# EAGLE board PCBvfinal v1 v3finaaaaal (EAGLE 9.7.0)
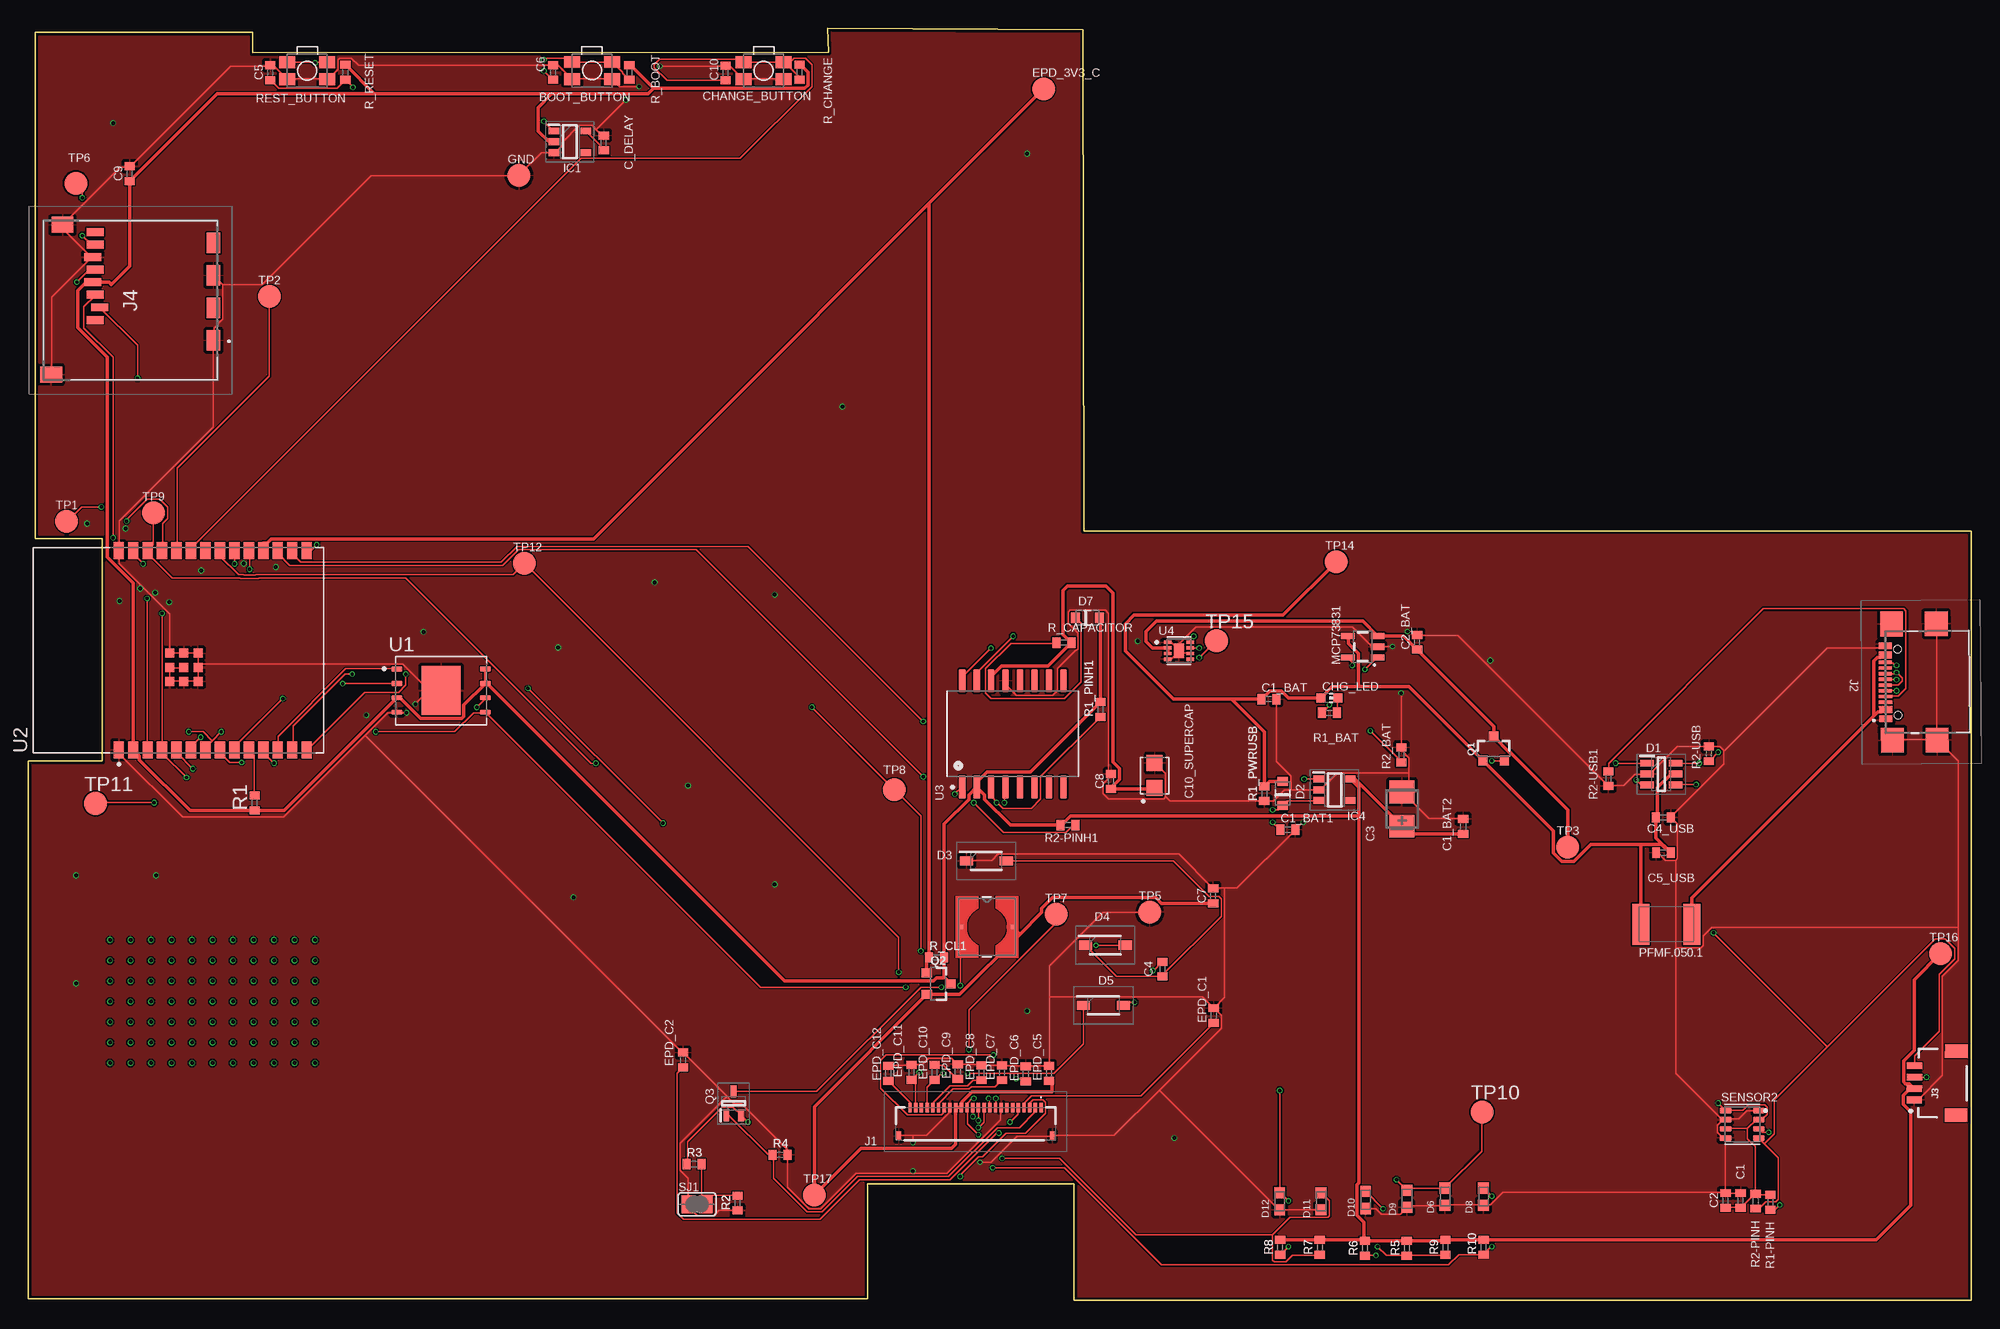
[diagram p0: board, top side]
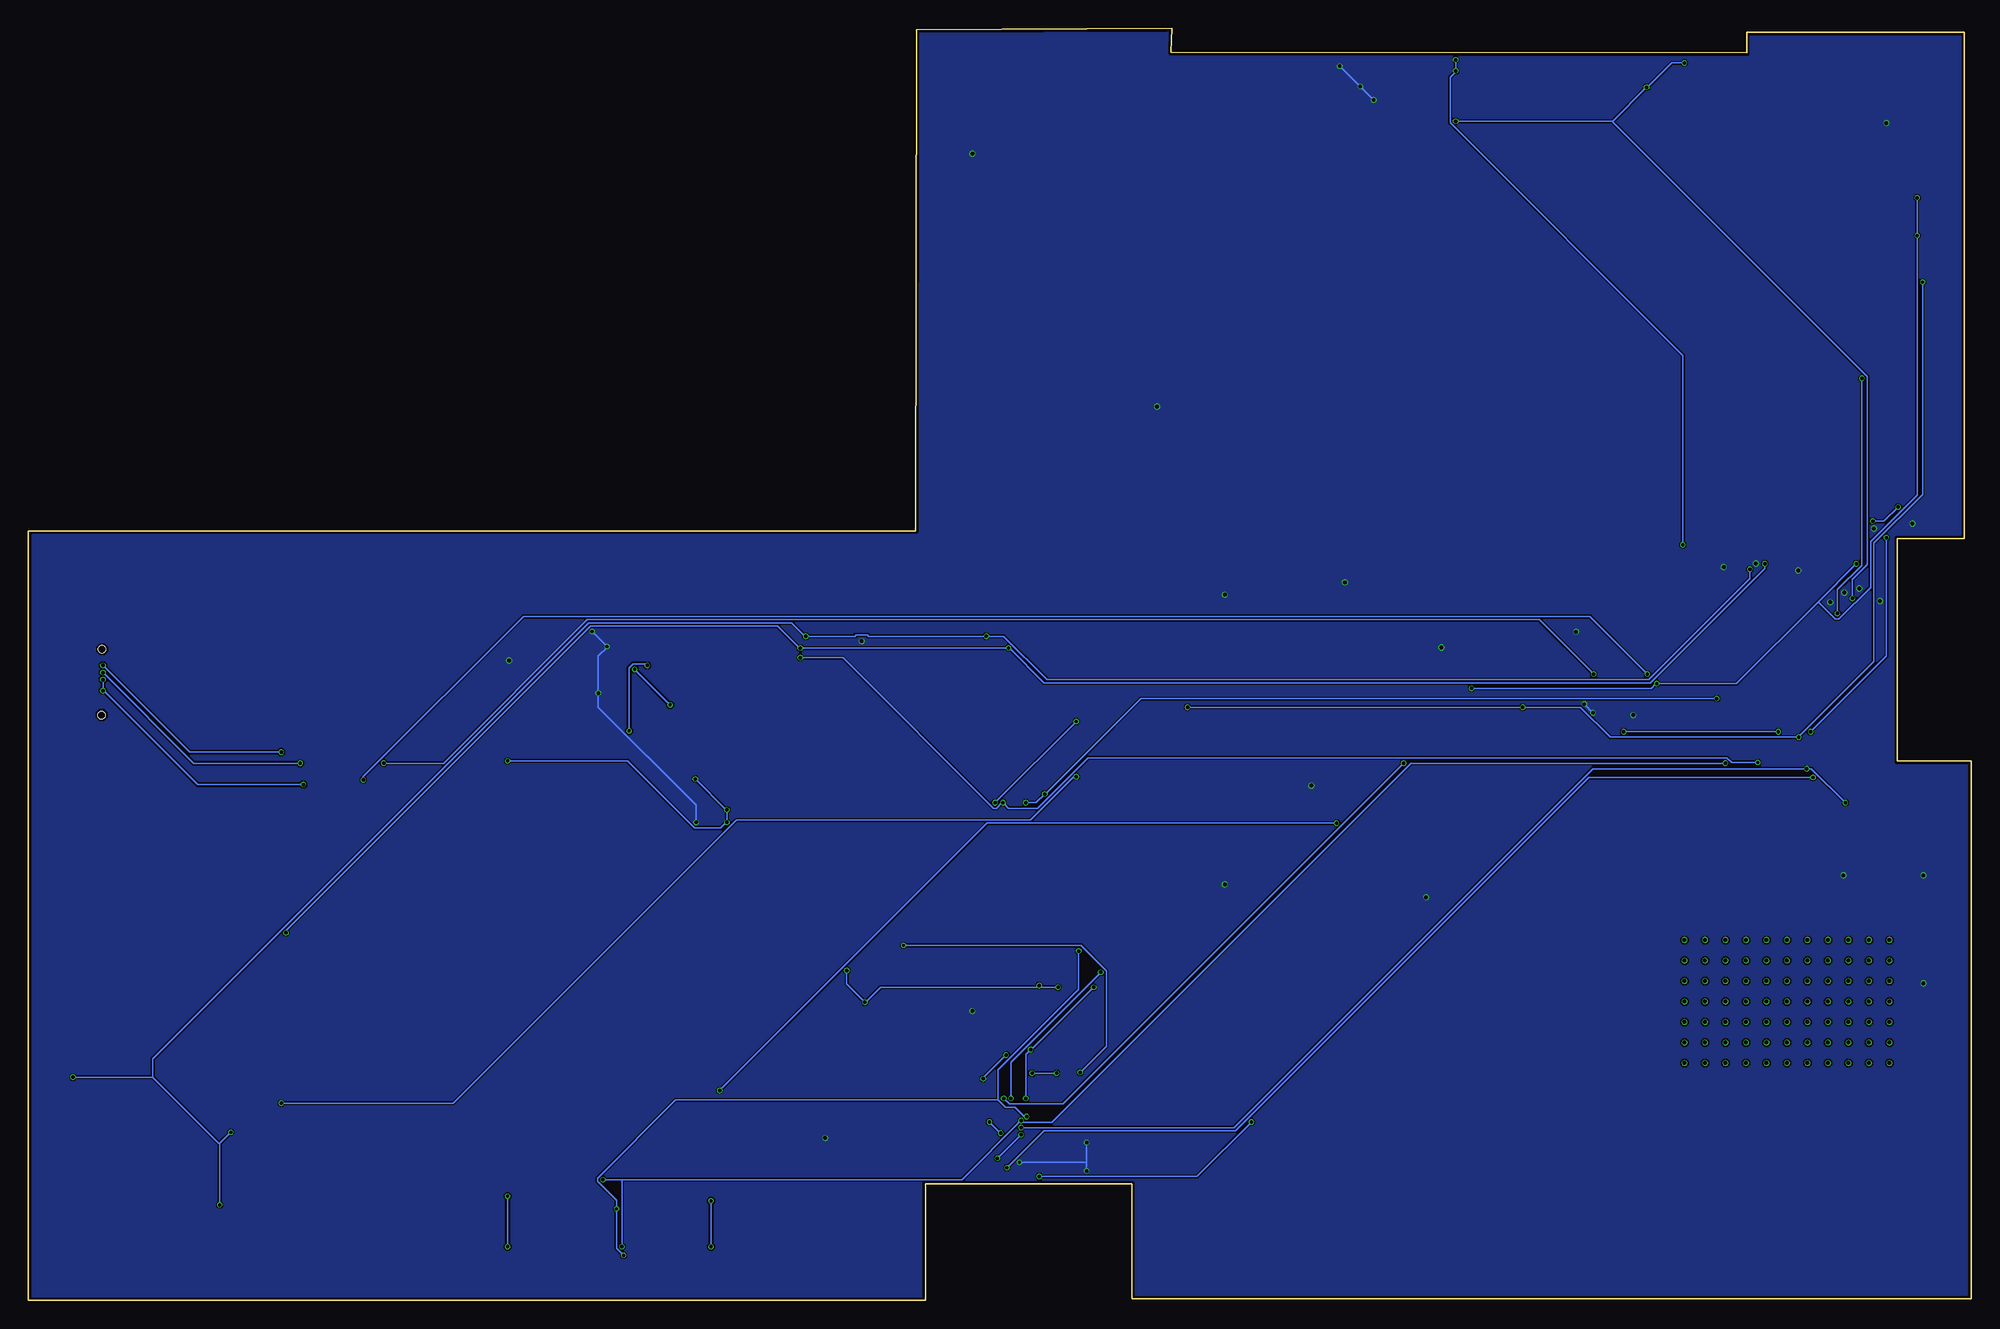
[diagram p1: board, bottom side, seen from below]

Size 170.55 x 111.69 mm. Coordinates in mm from the lower left corner, seen from the top.
Outline: 91.81,0 170.55,0 170.55,67.57 92.66,67.57 92.6,111.59 70.17,111.69 70.24,109.59 19.68,109.55 19.68,111.35 0.6,111.35 0.6,66.89 6.48,66.89 6.48,47.35 0,47.35 0,0.15 73.68,0.15 73.68,10.23 91.81,10.23 91.81,0
Copper layers (1*16): Top / Bottom
Stack-up Default Layer Stack: Top User Defined 0.035mm / Dielectric-1 User Defined 1.6mm / Bottom User Defined 0.035mm
Design rules: minimum copper width classes=1 0.3mm, minimum copper width classes=0 0.15mm, minimum copper width 5mil, minimum drill size 0.3mm, copper clearance wire_polygon to wire_polygon 5mil, copper clearance wire_polygon to pad_smd 5mil, copper clearance wire_polygon to via 5mil, copper clearance pad_smd to pad_smd 5mil, copper clearance pad_smd to via 5mil, copper clearance via to via 5mil, copper clearance smd to pad (same net) 5mil, copper clearance smd to via (same net) 5mil, copper clearance smd to smd (same net) 5mil, dimension clearance 0.2mm, via restrict clearance 0mil, restrict clearance 0mil, drill distance 6mil, keepout clearance 0mil
Net classes: 0 default: width 0.15 mm; 1 POWER: width 0.3 mm

## Footprints (pad centres in the part's own frame; a part is rotated, then mirrored left to right if it is on the bottom)
MYBUTTON = smd 1.4 x 1.05: 1 1.75,0.75; 2 -1.75,0.75; 3 -1.75,-0.75; 4 1.75,-0.75
ESP32_WROVER_EAGLE-LTSPICE_C0402 = smd 0.7 x 0.9: 1 -0.65,0; 2 0.65,0
RCL_CT3528 = smd 2 x 2.2: + -1.5,0; - 1.5,0
CAPCP3225X100N = smd 1.4 x 1.4: 1 -1.1,0; 2 1.1,0
ADAFRUIT_CHIP-LED0603 = smd 0.8 x 0.8: A 0,-0.75; C 0,0.75
SOT95P280X145-6N = smd 1.2 x 0.6: 1 -1.25,0.95; 2 -1.25,0; 3 -1.25,-0.95; 4 1.25,-0.95; 5 1.25,0; 6 1.25,0.95
ESP32_WROVER_AVX---SD0805S020S1R0_AVX_SD0805S020S1R0_0 = smd 0.8 x 0.9: 1 -1.05,0; 2 1.05,0
SOD3716X135N = smd 1.15 x 0.8: 1 -1.75,0; 2 1.75,0
DIOC1608X36N = smd 0.97 x 0.94: 1 -0.75,0; 2 0.75,0
TP20R = smd 2 x 2: TP 0,0
SOT95P280X125-5N = smd 0.9 x 0.6: 1 -1.4,0.95; 2 -1.4,0; 3 -1.4,-0.95; 4 1.4,-0.95; 5 1.4,0.95
SOT95P280X120-5N = smd 0.9 x 0.6: 1 -1.4,0.95; 2 -1.4,0; 3 -1.4,-0.95; 4 1.4,-0.95; 5 1.4,0.95
FH34SRJ24S05SH99 = smd 0.3 x 0.8: 1 5.75,1.45; 2 5.25,1.45; 3 4.75,1.45; 4 4.25,1.45; 5 3.75,1.45; 6 3.25,1.45; 7 2.75,1.45; 8 2.25,1.45; 9 1.75,1.45; 10 1.25,1.45; 11 0.75,1.45; 12 0.25,1.45; 13 -0.25,1.45; 14 -0.75,1.45; 15 -1.25,1.45; 16 -1.75,1.45; 17 -2.25,1.45; 18 -2.75,1.45; 19 -3.25,1.45; 20 -3.75,1.45; 21 -4.25,1.45; 22 -4.75,1.45; 23 -5.25,1.45; 24 -5.75,1.45 | smd 0.4 x 0.8: MP1 6.75,-1.05; MP2 -6.75,-1.05
SAMACSYS_PARTS_USB4110GFA = smd 0.3 x 1.15: A1 -3.35,3.678; A4 -2.55,3.678; A5 -1.25,3.678; A6 -0.25,3.678; A7 0.25,3.678; A8 1.25,3.678; A9 2.55,3.678; A12 3.35,3.678; B1 3.05,3.678; B4 2.25,3.678; B5 1.75,3.678; B6 0.75,3.678; B7 -0.75,3.678; B8 -1.75,3.678; B9 -2.25,3.678; B12 -3.05,3.678 | smd 2.18 x 2: MP1 -5.11,-0.827; MP2 5.11,-0.827; MP3 -5.11,3.103; MP4 5.11,3.103 | hole 0.65: -2.89,2.603; 2.89,2.603
JST04_1MM_RA = smd 0.6 x 1.35: 1 -1.5,0; 2 -0.5,0; 3 0.5,0; 4 1.5,0 | smd 1.2 x 2: NC1 2.8,-3.675; NC2 -2.8,-3.675
112ATAARR03ATTEND = smd 1.8 x 1.2: G1 10.6,10.4; G2 4.9,10.4; S1 7.75,10.4; S2 2.05,10.4 | smd 1.4 x 1.9: G3 13.6,-3.85; G4 0.45,-2.85 | smd 0.7 x 1.5: P1 8.8,0; P2 7.7,0.4; P3 6.6,0; P4 5.5,-0.2; P5 4.4,0; P6 3.3,-0.2; P7 2.2,0; P8 1.1,0
IND_4828-WE-TPC_WRE = smd 0.33 x 0.33: 1 -2.286,0; 2 2.286,0
ESP32_WROVER_SPARKFUN-IC-POWER_SOT23-5 = smd 0.55 x 1.2: 1 -0.95,-1.3; 2 0,-1.3; 3 0.95,-1.3; 4 0.95,1.3; 5 -0.95,1.3
ESP32C6_VARISTOR_CT/CN1812 = smd 1.5 x 3.6: 1 -2.25,0; 2 2.25,0
ESP32_WROVER_SPARKFUN-DISCRETESEMI_SOT23-3 = smd 0.8 x 0.9: 1 -0.95,-1; 2 0.95,-1; 3 0,1.1
SOT65P210X110-3N = smd 1.05 x 0.5: 1 -1.05,0.65; 2 -1.05,-0.65; 3 1.05,0
ESP32_WROVER_EAGLE-LTSPICE_R0402 = smd 0.7 x 0.9: 1 -0.65,0; 2 0.65,0
ESP32_WROVER_BME680_PSON80P300X300X100-8N = smd 1.016 x 0.5: 1 1.458,1.2; 2 1.458,0.4; 3 1.458,-0.4; 4 1.458,-1.2; 5 -1.458,-1.22; 6 -1.458,-0.4; 7 -1.458,0.4; 8 -1.458,1.2
SJ = smd 1.168 x 1.6: 1 -0.762,0; 2 0.762,0
SON127P600X800X80-9N = smd 0.94 x 0.44: 1 -3.895,1.905; 2 -3.895,0.635; 3 -3.895,-0.635; 4 -3.895,-1.905; 5 3.895,-1.905; 6 3.895,-0.635; 7 3.895,0.635; 8 3.895,1.905 | smd 3.4 x 4.3: 9 0,0
XCVR_ESP32-C6-WROOM-1-N8 = smd 1.5 x 0.9: 1 -8.75,5.26; 2 -8.75,3.99; 3 -8.75,2.72; 4 -8.75,1.45; 5 -8.75,0.18; 6 -8.75,-1.09; 7 -8.75,-2.36; 8 -8.75,-3.63; 9 -8.75,-4.9; 10 -8.75,-6.17; 11 -8.75,-7.44; 12 -8.75,-8.71; 13 -8.75,-9.98; 14 -8.75,-11.25; 15 8.75,-11.25; 16 8.75,-9.98; 17 8.75,-8.71; 18 8.75,-7.44; 19 8.75,-6.17; 20 8.75,-4.9; 21 8.75,-3.63; 22 8.75,-2.36; 23 8.75,-1.09; 24 8.75,0.18; 25 8.75,1.45; 26 8.75,2.72; 27 8.75,3.99; 28 8.75,5.26 | smd 0.8 x 0.8: 29_1 -2.755,0.79; 29_2 -1.505,0.79; 29_3 -0.255,0.79; 29_4 -2.755,-0.46; 29_5 -1.505,-0.46; 29_6 -0.255,-0.46; 29_7 -2.755,-1.71; 29_8 -1.505,-1.71; 29_9 -0.255,-1.71
SOIC127P1032X265-16N = smd 2.05 x 0.59: 1 -4.655,4.445; 2 -4.655,3.175; 3 -4.655,1.905; 4 -4.655,0.635; 5 -4.655,-0.635; 6 -4.655,-1.905; 7 -4.655,-3.175; 8 -4.655,-4.445; 9 4.655,-4.445; 10 4.655,-3.175; 11 4.655,-1.905; 12 4.655,-0.635; 13 4.655,0.635; 14 4.655,1.905; 15 4.655,3.175; 16 4.655,4.445
SON50P200X200X80-9N = smd 0.76 x 0.27: 1 -0.985,0.75; 2 -0.985,0.25; 3 -0.985,-0.25; 4 -0.985,-0.75; 5 0.985,-0.75; 6 0.985,-0.25; 7 0.985,0.25; 8 0.985,0.75 | smd 0.9 x 1.3: 9 0,0

## Placement (x,y rotation side)
BOOT_BUTTON  BUTTON_CUSYOMV1  [MYBUTTON]  49.48,108 180 top
C1  100nF  [ESP32_WROVER_EAGLE-LTSPICE_C0402]  150.31,8.78 90 top
C1_BAT  4.7uF  [ESP32_WROVER_EAGLE-LTSPICE_C0402]  108.9,52.8 0 top
C1_BAT1  4.7uF  [ESP32_WROVER_EAGLE-LTSPICE_C0402]  110.57,41.34 0 top
C1_BAT2  4.7uF  [ESP32_WROVER_EAGLE-LTSPICE_C0402]  125.96,41.62 90 top
C2  100nF  [ESP32_WROVER_EAGLE-LTSPICE_C0402]  148.99,8.78 90 top
C2_BAT  4.7uF  [ESP32_WROVER_EAGLE-LTSPICE_C0402]  121.91,57.8 90 top
C3  100uF TANT  [RCL_CT3528]  120.59,43.15 90 top
C4  4.7uF/25V  [ESP32_WROVER_EAGLE-LTSPICE_C0402]  99.55,29.09 90 top
C4_USB  100nF  [ESP32_WROVER_EAGLE-LTSPICE_C0402]  143.54,42.42 0 top
C5  1uF  [ESP32_WROVER_EAGLE-LTSPICE_C0402]  21.23,107.81 90 top
C5_USB  4.7uF  [ESP32_WROVER_EAGLE-LTSPICE_C0402]  143.55,39.32 180 top
C6  100nF  [ESP32_WROVER_EAGLE-LTSPICE_C0402]  46.07,107.83 90 top
C7  10uF  [ESP32_WROVER_EAGLE-LTSPICE_C0402]  104.01,35.52 90 top
C8  100nF  [ESP32_WROVER_EAGLE-LTSPICE_C0402]  95.05,45.58 90 top
C9  100nF  [ESP32_WROVER_EAGLE-LTSPICE_C0402]  8.89,98.94 90 top
C10  100nF  [ESP32_WROVER_EAGLE-LTSPICE_C0402]  61.21,107.78 90 top
C10_SUPERCAP  CPH3225A  [CAPCP3225X100N]  98.87,46.09 90 top
C_DELAY  100nF  [ESP32_WROVER_EAGLE-LTSPICE_C0402]  50.51,101.64 90 top
CHANGE_BUTTON  BUTTON_CUSYOMV1  [MYBUTTON]  64.54,107.98 180 top
CHG_LED  [ADAFRUIT_CHIP-LED0603]  114.22,52.9 270 top
D1  USBLC6-2SC6Y  [SOT95P280X145-6N]  143.36,46.22 0 top
D2  ESP32_WROVER_AVX---SD0805S020S1R0_AVX_SD0805S020S1R0_0_0AVX_SD0805S020S1R0_0_0  [ESP32_WROVER_AVX---SD0805S020S1R0_AVX_SD0805S020S1R0_0]  110.11,44.53 90 top
D3  MBR0530  [SOD3716X135N]  84.1,38.6 0 top
D4  MBR0530  [SOD3716X135N]  94.54,31.2 0 top
D5  MBR0530  [SOD3716X135N]  94.38,25.9 0 top
D6  PGB1010603MR  [DIOC1608X36N]  124.36,9.12 90 top
D7  ESP32_WROVER_AVX---SD0805S020S1R0_AVX_SD0805S020S1R0_0_0AVX_SD0805S020S1R0_0_0  [ESP32_WROVER_AVX---SD0805S020S1R0_AVX_SD0805S020S1R0_0]  92.98,59.95 0 top
D8  PGB1010603MR  [DIOC1608X36N]  127.74,9.12 90 top
D9  PGB1010603MR  [DIOC1608X36N]  121.02,8.92 90 top
D10  PGB1010603MR  [DIOC1608X36N]  117.4,8.82 90 top
D11  PGB1010603MR  [DIOC1608X36N]  113.48,8.72 90 top
D12  PGB1010603MR  [DIOC1608X36N]  109.86,8.72 90 top
EPD_3V3_C  TPTP20R  [TP20R]  89.12,106.38 0 top
EPD_C1  1uF/50v  [ESP32_WROVER_EAGLE-LTSPICE_C0402]  104.06,25.02 90 top
EPD_C2  1uF/50V  [ESP32_WROVER_EAGLE-LTSPICE_C0402]  57.47,21.12 90 top
EPD_C5  0.1uF/50V  [ESP32_WROVER_EAGLE-LTSPICE_C0402]  89.59,19.94 90 top
EPD_C6  1uF/50V  [ESP32_WROVER_EAGLE-LTSPICE_C0402]  87.56,19.9 90 top
EPD_C7  1uF/50V  [ESP32_WROVER_EAGLE-LTSPICE_C0402]  85.47,20 90 top
EPD_C8  1uF/50V  [ESP32_WROVER_EAGLE-LTSPICE_C0402]  83.68,20 90 top
EPD_C9  1uF/50V  [ESP32_WROVER_EAGLE-LTSPICE_C0402]  81.59,20.1 90 top
EPD_C10  1uF/50V  [ESP32_WROVER_EAGLE-LTSPICE_C0402]  79.55,20.04 90 top
EPD_C11  1uF/50V  [ESP32_WROVER_EAGLE-LTSPICE_C0402]  77.53,20.04 90 top
EPD_C12  1uF/50V  [ESP32_WROVER_EAGLE-LTSPICE_C0402]  75.49,19.94 90 top
GND  TPTP20R  [TP20R]  43.07,98.78 0 top
IC1  BD5229G-TR  [SOT95P280X125-5N]  47.53,101.74 0 top
IC4  XC6220A331MR-G  [SOT95P280X120-5N]  114.67,44.84 0 top
J1  FH34SRJ-24S-0.5SH_99_  [FH34SRJ24S05SH99]  83.15,15.49 0 top
J2  SAMACSYS_PARTS_USB4110-GF-A  [SAMACSYS_PARTS_USB4110GFA]  166.71,54.31 90.4 top
J3  QWIIC_RIGHT_ANGLE  [JST04_1MM_RA]  165.58,19.11 89.6 top
J4  112A-TAAR-R03_ATTEND  [112ATAARR03ATTEND]  5.85,94.9 270 top
L1  68uH  [IND_4828-WE-TPC_WRE]  84.15,32.8 0 top
MCP73831  ESP32_WROVER_SPARKFUN-IC-POWER_MCP73831  [ESP32_WROVER_SPARKFUN-IC-POWER_SOT23-5]  117.14,57.4 90 top
PFMF.050.1  ESP32C6_VARISTORCN1812  [ESP32C6_VARISTOR_CT/CN1812]  143.8,33.03 180 top
Q1  20V/4.2A/52mΩ/1.4W  [ESP32_WROVER_SPARKFUN-DISCRETESEMI_SOT23-3]  128.64,48.41 0 top
Q2  20V/4.2A/52mΩ/1.4W  [ESP32_WROVER_SPARKFUN-DISCRETESEMI_SOT23-3]  79.86,27.81 270 top
Q3  SI1308EDL-T1-GE3  [SOT65P210X110-3N]  61.91,17.3 90 top
R1  10K  [ESP32_WROVER_EAGLE-LTSPICE_R0402]  19.85,43.68 90 top
R1-PINH  10K  [ESP32_WROVER_EAGLE-LTSPICE_R0402]  152.92,8.62 90 top
R1_BAT  200  [ESP32_WROVER_EAGLE-LTSPICE_R0402]  114.22,51.6 0 top
R1_PINH1  1OK  [ESP32_WROVER_EAGLE-LTSPICE_R0402]  94.11,51.89 90 top
R1_PWRUSB  100K  [ESP32_WROVER_EAGLE-LTSPICE_R0402]  108.5,44.49 90 top
R2  2.2  [ESP32_WROVER_EAGLE-LTSPICE_R0402]  62.25,8.56 90 top
R2-PINH  10K  [ESP32_WROVER_EAGLE-LTSPICE_R0402]  151.63,8.72 90 top
R2-PINH1  10K  [ESP32_WROVER_EAGLE-LTSPICE_R0402]  91.27,41.74 180 top
R2-USB  5k1  [ESP32_WROVER_EAGLE-LTSPICE_R0402]  147.54,48 90 top
R2-USB1  5k1  [ESP32_WROVER_EAGLE-LTSPICE_R0402]  138.7,45.82 90 top
R2_BAT  2K  [ESP32_WROVER_EAGLE-LTSPICE_R0402]  120.53,47.9 90 top
R3  0.47  [ESP32_WROVER_EAGLE-LTSPICE_R0402]  58.43,11.98 0 top
R4  10K  [ESP32_WROVER_EAGLE-LTSPICE_R0402]  65.99,12.78 0 top
R5  10K  [ESP32_WROVER_EAGLE-LTSPICE_R0402]  121.01,4.58 90 top
R6  10K  [ESP32_WROVER_EAGLE-LTSPICE_R0402]  117.33,4.58 90 top
R7  10K  [ESP32_WROVER_EAGLE-LTSPICE_R0402]  113.37,4.66 90 top
R8  10K  [ESP32_WROVER_EAGLE-LTSPICE_R0402]  109.89,4.66 90 top
R9  10K  [ESP32_WROVER_EAGLE-LTSPICE_R0402]  124.41,4.66 90 top
R10  10K  [ESP32_WROVER_EAGLE-LTSPICE_R0402]  127.75,4.68 90 top
R_BOOT  1OK  [ESP32_WROVER_EAGLE-LTSPICE_R0402]  52.76,107.82 90 top
R_CAPACITOR  15  [ESP32_WROVER_EAGLE-LTSPICE_R0402]  90.92,57.76 0 top
R_CHANGE  10K  [ESP32_WROVER_EAGLE-LTSPICE_R0402]  67.7,107.84 90 top
R_CL1  10K  [ESP32_WROVER_EAGLE-LTSPICE_R0402]  79.73,30.12 0 top
R_RESET  10K  [ESP32_WROVER_EAGLE-LTSPICE_R0402]  27.83,107.84 90 top
REST_BUTTON  BUTTON_CUSYOMV1  [MYBUTTON]  24.48,107.98 180 top
SENSOR2  BME680  [ESP32_WROVER_BME680_PSON80P300X300X100-8N]  150.46,15.47 0 top
SJ1  [SJ]  58.7,8.44 0 top
TP1  TPTP20R  [TP20R]  3.35,68.42 0 top
TP2  TPTP20R  [TP20R]  21.15,88.16 0 top
TP3  TPTP20R  [TP20R]  135.15,39.82 0 top
TP5  TPTP20R  [TP20R]  98.45,34.1 0 top
TP6  TPTP20R  [TP20R]  4.15,98.1 0 top
TP7  TPTP20R  [TP20R]  90.23,33.9 0 top
TP8  TPTP20R  [TP20R]  76.03,44.86 0 top
TP9  TPTP20R  [TP20R]  10.97,69.16 0 top
TP10  TPTP20R  [TP20R]  127.62,16.56 0 top
TP11  TPTP20R  [TP20R]  5.89,43.64 0 top
TP12  TPTP20R  [TP20R]  43.53,64.72 0 top
TP14  TPTP20R  [TP20R]  114.82,64.86 0 top
TP15  TPTP20R  [TP20R]  104.3,57.92 0 top
TP16  TPTP20R  [TP20R]  167.87,30.46 0 top
TP17  TPTP20R  [TP20R]  69,9.26 0 top
U1  W25Q512JVEIQ  [SON127P600X800X80-9N]  36.23,53.55 0 top
U2  ESP32-C6-WROOM-1-N8  [XCVR_ESP32-C6-WROOM-1-N8]  13.18,57.09 90 top
U3  DS3231SN#  [SOIC127P1032X265-16N]  86.43,49.75 90 top
U4  MAX17048G+T10  [SON50P200X200X80-9N]  101.01,57.05 0 top

## Library data of the parts
BOOT_BUTTON CHANGE_BUTTON CHG_LED GND PFMF.050.1 REST_BUTTON SJ1 TP1-TP3 TP5-TP12 TP14-TP17 = DeskAssistant v19 v1
C1 C1_BAT C1_BAT1 C1_BAT2 C2 C2_BAT C4 C4_USB C5 C5_USB C6-C10 C_DELAY EPD_C1 EPD_C2 EPD_C5-EPD_C12 = DeskAssistant v19 v1; SPICEMODEL: NONE; SPICEPREFIX: C
C3 = DeskAssistant v19 v1; SPICEPREFIX: C
C10_SUPERCAP = DeskAssistant v19 v1; AVAILABILITY: Not in stock; CHECK_PRICES: https://www.snapeda.com/parts/CPH3225A/Seiko+Instruments/view-part/?ref=eda; DESCRIPTION: 11 mF (EDLC) Supercapacitor 3.3 V 1210 (3225 Metric) - -; MF: Seiko Instruments; MP: CPH3225A; PACKAGE: 1210 Seiko; PRICE: None; PURCHASE-URL: https://www.snapeda.com/api/url_track_click_mouser/?unipart_id=562593&manufacturer=Seiko Instruments&part_name=CPH3225A&search_term=None; SNAPEDA_LINK: https://www.snapeda.com/parts/CPH3225A/Seiko+Instruments/view-part/?ref=snap
D1 = DeskAssistant v19 v1; AVAILABILITY: In Stock; CHECK_PRICES: https://www.snapeda.com/parts/USBLC6-2SC6Y/STMicroelectronics/view-part/?ref=eda; DESCRIPTION: 17V Clamp 5A (8/20µs) Ipp Tvs Diode Surface Mount SOT-23-6; MF: STMicroelectronics; MP: USBLC6-2SC6Y; PACKAGE: SOT-23-6 STMicroelectronics; PRICE: None; SNAPEDA_LINK: https://www.snapeda.com/parts/USBLC6-2SC6Y/STMicroelectronics/view-part/?ref=snap
D2 D7 = DeskAssistant v19 v1; CENTROID_NOT_SPECIFIED: No; DATASHEET: http://datasheets.avx.com/schottky.pdf; DIGIKEY_DESCRIPTION: DIODE SCHOTTKY 20V 1A 0805; DIGIKEY_PART_NUMBER: 478-7800-1-ND; LEAD_FREE: yes; MF: AVX; MOUSER_PART_NUMBER: 581-SD0805S020S1R0; PACKAGE: 0805 (2012 metric); PREFIX: D; ROHS: yes; TEMPERATURE_RANGE_HIGH: +125°C; TEMPERATURE_RANGE_LOW: -55°C
D3-D5 = DeskAssistant v19 v1; AVAILABILITY: In Stock; CHECK_PRICES: https://www.snapeda.com/parts/MBR0530/Onsemi/view-part/?ref=eda; DESCRIPTION: Diode Schottky 30 V 500mA Surface Mount SOD-123; MF: ON Semiconductor; MP: MBR0530; PACKAGE: SOD-123-2 ON Semiconductor; PRICE: None; PURCHASE-URL: https://www.snapeda.com/api/url_track_click_mouser/?unipart_id=179458&manufacturer=ON Semiconductor&part_name=MBR0530&search_term=None; SNAPEDA_LINK: https://www.snapeda.com/parts/MBR0530/Onsemi/view-part/?ref=snap
D6 D8-D12 = DeskAssistant v19 v1; AVAILABILITY: In Stock; CHECK_PRICES: https://www.snapeda.com/parts/PGB1010603MR/Littelfuse/view-part/?ref=eda; DESCRIPTION: 150V (Typ) Clamp - Ipp Tvs Diode Surface Mount 0603 (1608 Metric); MF: Littelfuse Inc.; MP: PGB1010603MR; PACKAGE: 0603 Littelfuse Inc.; PRICE: None; PURCHASE-URL: https://www.snapeda.com/api/url_track_click_mouser/?unipart_id=5659453&manufacturer=Littelfuse Inc.&part_name=PGB1010603MR&search_term=None; SNAPEDA_LINK: https://www.snapeda.com/parts/PGB1010603MR/Littelfuse/view-part/?ref=snap
EPD_3V3_C = DeskAssistant v19 v1; 3D_NAME: EPD_3V3
IC1 = DeskAssistant v19 v1; DESCRIPTION: Voltage Detector with Adjustable Delay Time: CMOS processes are utilized to develop high precision, low current consumption CMOS reset ICs that allow arbitrary setting of the delay time. The extensive lineup includes both Nch Open Drain and CMOS output types in a wide range of detection voltages (from 2.3V to 6.0V, in 0.1V steps), enabling selection of the ideal solution based on customer requirements. In addition, the entire series is of course both lead-free and RoHS-compliant.; HEIGHT: 1.25mm; MANUFACTURER_NAME: ROHM Semiconductor; MANUFACTURER_PART_NUMBER: BD5229G-TR; MOUSER_PART_NUMBER: 755-BD5229G-TR; MOUSER_PRICE-STOCK: https://www.mouser.co.uk/ProductDetail/ROHM-Semiconductor/BD5229G-TR?qs=4kLU8WoGk0vvnhrrYwdszw%3D%3D
IC4 = DeskAssistant v19 v1; DESCRIPTION: LDO Voltage Regulators; HEIGHT: 1.2mm; MANUFACTURER_NAME: Torex; MANUFACTURER_PART_NUMBER: XC6220A331MR-G; MOUSER_PART_NUMBER: 865-XC6220A331MR-G; MOUSER_PRICE-STOCK: https://www.mouser.co.uk/ProductDetail/Torex-Semiconductor/XC6220A331MR-G?qs=AsjdqWjXhJ8ZSWznL1J0gg%3D%3D
J1 = DeskAssistant v19 v1; DESCRIPTION: 24 Position FFC, FPC Connector Contacts, Top and Bottom 0.020" (0.50mm) Surface Mount, Right Angle; HEIGHT: 1.1mm; MANUFACTURER_NAME: Hirose; MANUFACTURER_PART_NUMBER: FH34SRJ-24S-0.5SH(99); MOUSER_PART_NUMBER: 798-FH34SRJ24S05SH99; MOUSER_PRICE-STOCK: https://www.mouser.co.uk/ProductDetail/Hirose-Connector/FH34SRJ-24S-0.5SH99?qs=vcbW%252B4%252BSTIpKBl5ap9J8Fw%3D%3D
J2 = DeskAssistant v19 v1; DESCRIPTION: CONN USB 2.0 TYPE-C R/A SMT; HEIGHT: 3.26mm; MANUFACTURER_NAME: GCT (GLOBAL CONNECTOR TECHNOLOGY); MANUFACTURER_PART_NUMBER: USB4110-GF-A; MOUSER_PART_NUMBER: 640-USB4110-GF-A; MOUSER_PRICE-STOCK: https://www.mouser.co.uk/ProductDetail/GCT/USB4110-GF-A?qs=KUoIvG%2F9IlYiZvIXQjyJeA%3D%3D
J3 = DeskAssistant v19 v1; PROD_ID: CONN-13694
J4 = DeskAssistant v19 v1; DESCRIPTION: Micro SD Card Socket, Push-Push Type, Top Mount, SMT, H=1.83mm, 10u; HEIGHT: 1.9mm; MANUFACTURER_NAME: ATTEND; MANUFACTURER_PART_NUMBER: 112A-TAAR-R03 ATTEND
L1 = DeskAssistant v19 v1; COPYRIGHT: Copyright (C) 2024 Ultra Librarian. All rights reserved.; MANUFACTURER_PART_NUMBER: 744043680; MFR_NAME: Wurth Electronics
MCP73831 = DeskAssistant v19 v1; PROD_ID: IC-09995
Q1 Q2 = DeskAssistant v19 v1; PROD_ID: TRAN-14388
Q3 = DeskAssistant v19 v1; AVAILABILITY: In Stock; CHECK_PRICES: https://www.snapeda.com/parts/SI1308EDL-T1-GE3/Vishay+Siliconix/view-part/?ref=eda; DESCRIPTION: Si1308EDL-T1-GE3 N-channel MOSFET Transistor, 1.5 A, 30 V, 3-Pin SC-70 | Siliconix / Vishay SI1308EDL-T1-GE3; MF: Vishay Siliconix; MP: SI1308EDL-T1-GE3; PACKAGE: SOT-323 Vishay Semiconductor; PRICE: None; PURCHASE-URL: https://www.snapeda.com/api/url_track_click_mouser/?unipart_id=274603&manufacturer=Vishay Siliconix&part_name=SI1308EDL-T1-GE3&search_term=None; SNAPEDA_LINK: https://www.snapeda.com/parts/SI1308EDL-T1-GE3/Vishay+Siliconix/view-part/?ref=snap
R1 R1-PINH R1_BAT R1_PINH1 R1_PWRUSB R2 R2-PINH R2-PINH1 R2-USB R2-USB1 R2_BAT R3-R10 R_BOOT R_CAPACITOR R_CHANGE R_CL1 R_RESET = DeskAssistant v19 v1; SPICEMODEL: NONE; SPICEPREFIX: R
SENSOR2 = DeskAssistant v19 v1; AVAILABILITY: Unavailable; DESCRIPTION: Integrated Environmental Unit; MF: Bosch Sensortec; MP: BME680; PACKAGE: LGA-8 Bosch Tools; PRICE: None
U1 = DeskAssistant v19 v1; AVAILABILITY: In Stock; CHECK_PRICES: https://www.snapeda.com/parts/W25Q512JVEIQ/Winbond+Electronics/view-part/?ref=eda; DESCRIPTION: FLASH - NOR Memory IC 512Mb (64M x 8) SPI - Quad I/O 133 MHz 8-WSON (8x6); MF: Winbond Electronics; MP: W25Q512JVEIQ; PACKAGE: Package; PRICE: None; SNAPEDA_LINK: https://www.snapeda.com/parts/W25Q512JVEIQ/Winbond+Electronics/view-part/?ref=snap
U2 = DeskAssistant v19 v1; AVAILABILITY: In Stock; CHECK_PRICES: https://www.snapeda.com/parts/ESP32-C6-WROOM-1-N8/Espressif+Systems/view-part/?ref=eda; DESCRIPTION: Multiprotocol Modules ESP32-C6 module, Wi-Fi 6 in 2.4 GHz band, Bluetooth 5, Zigbee 3.0 and Thread. ESP34-WROOM Compatible - ENGINEERING SAMPLE; MF: Espressif Systems; MP: ESP32-C6-WROOM-1-N8; PACKAGE: None; PRICE: None; SNAPEDA_LINK: https://www.snapeda.com/parts/ESP32-C6-WROOM-1-N8/Espressif+Systems/view-part/?ref=snap
U3 = DeskAssistant v19 v1; AVAILABILITY: In Stock; CHECK_PRICES: https://www.snapeda.com/parts/DS3231SN%23/Analog+Devices/view-part/?ref=eda; DESCRIPTION: Extremely Accurate I²C-Integrated RTC/TCXO/Crystal; MF: Analog Devices; MP: DS3231SN#; PACKAGE: SOIC-16 Maxim; PRICE: None; PURCHASE-URL: https://www.snapeda.com/api/url_track_click_mouser/?unipart_id=99048&manufacturer=Analog Devices&part_name=DS3231SN#&search_term=None; SNAPEDA_LINK: https://www.snapeda.com/parts/DS3231SN%23/Analog+Devices/view-part/?ref=snap
U4 = DeskAssistant v19 v1; AVAILABILITY: In Stock; CHECK_PRICES: https://www.snapeda.com/parts/MAX17048G+T10/Analog+Devices/view-part/?ref=eda; DESCRIPTION: 3µA 1-Cell/2-Cell Fuel Gauge with ModelGauge; MF: Analog Devices; MP: MAX17048G+T10; PACKAGE: TDFN-8 Maxim; PRICE: None; PURCHASE-URL: https://www.snapeda.com/api/url_track_click_mouser/?unipart_id=329239&manufacturer=Analog Devices&part_name=MAX17048G+T10&search_term=None; SNAPEDA_LINK: https://www.snapeda.com/parts/MAX17048G+T10/Analog+Devices/view-part/?ref=snap

## Nets
3V3 [POWER]: C1_BAT2.1 C3.+ C9.1 D7.2 IC1.2 IC4.5 J3.2 J4.P4 Q2.3 R1.1 R1_PINH1.2 R2-PINH1.2 R5.2 R6.2 R7.2 R8.2 R9.2 R10.2 R_BOOT.2 R_CHANGE.2 R_CL1.2 R_RESET.2 TP16.TP U1.3 U1.7 U1.8 U2.2 U3.2
32KHZ: R2-PINH1.1 U2.9 U3.1
DN: D1.4 J2.A7 J2.B7
DP: D1.6 J2.A6 J2.B6
EPD_3V3 [POWER]: C7.1 EPD_C5.1 J1.15 J1.16 L1.2 Q2.2 TP17.TP
EPD_3V3_C [POWER]: EPD_3V3_C.TP Q2.1 R_CL1.1 U2.18
EPD_BUSY: J1.9 TP9.TP U2.26
EPD_CS: D6.2 D9.2 J1.12 R5.1 R9.1 TP10.TP U2.11
EPD_DC: J1.11 TP11.TP U2.5
EPD_RST: J1.10 TP12.TP U2.21
FLASH_CS: U1.1 U2.12
GDR: J1.2 Q3.1 R4.1
GND: BOOT_BUTTON.1 BOOT_BUTTON.2 C1.2 C1_BAT1.2 C1_BAT2.2 C1_BAT.2 C2.2 C2_BAT.2 C3.- C4_USB.2 C5.2 C5_USB.2 C6.2 C7.2 C8.2 C9.2 C10.2 C10_SUPERCAP.2 C_DELAY.2 CHANGE_BUTTON.1 CHANGE_BUTTON.2 D1.2 D3.1 D6.1 D8.1 D9.1 D10.1 D11.1 D12.1 EPD_C1.2 EPD_C2.2 EPD_C5.2 EPD_C6.2 EPD_C7.2 EPD_C8.2 EPD_C9.2 EPD_C11.2 EPD_C12.2 GND.TP IC1.3 IC4.2 J1.8 J1.17 J1.MP1 J1.MP2 J2.A1 J2.A12 J2.B1 J2.B12 J2.MP1 J2.MP2 J2.MP3 J2.MP4 J3.1 J4.G1 J4.G2 J4.G3 J4.G4 J4.P6 MCP73831.2 R1_PWRUSB.1 R2-USB1.1 R2-USB.2 R2.1 R2_BAT.2 R4.2 REST_BUTTON.1 REST_BUTTON.2 SENSOR2.1 SENSOR2.5 SENSOR2.7 SJ1.1 TP5.TP U1.4 U1.9 U2.1 U2.28 U2.29_1 U2.29_2 U2.29_3 U2.29_4 U2.29_5 U2.29_6 U2.29_7 U2.29_8 U2.29_9 U3.13 U4.1 U4.4 U4.6 U4.9
GPIO8: R1.2 U2.10
I2C_PW: C1.1 C2.1 R1-PINH.2 R2-PINH.2 SENSOR2.2 SENSOR2.6 SENSOR2.8 U2.17
INT_RTC: R1_PINH1.1 TP15.TP U2.8 U3.3
IO/BOOT: BOOT_BUTTON.3 BOOT_BUTTON.4 C6.1 R_BOOT.1 U2.15
IO/CHANGE: C10.1 CHANGE_BUTTON.3 CHANGE_BUTTON.4 R_CHANGE.1 U2.23
MISO: D12.2 J4.P7 R8.1 TP6.TP U1.2 U2.27
MOSI: D11.2 J1.14 J4.P3 R7.1 TP7.TP U1.5 U2.7
N$1: EPD_C9.1 EPD_C10.2
N$2: J2.B5 R2-USB.1
N$3: EPD_C12.1 J1.24
N$4: C1_BAT1.1 D2.1 IC4.1 IC4.3 Q1.2
N$5: C4.1 D3.2 D4.1
N$6: MCP73831.5 R2_BAT.1
N$7: CHG_LED.C R1_BAT.2
N$8: MCP73831.1 R1_BAT.1
N$9: J2.A5 R2-USB1.2
N$10: EPD_C8.1 J1.20
N$11: EPD_C7.1 J1.19
N$12: EPD_C6.1 J1.18
N$13: EPD_C2.1 J1.5
N$14: EPD_C1.1 J1.4
N$18: C_DELAY.1 IC1.5
N$19: D7.1 R_CAPACITOR.1
PREVGH: D5.1 EPD_C10.1 J1.21
PREVGL: D4.2 EPD_C11.1 J1.23
RESE: J1.3 Q3.2 R3.1
RESE': R2.2 R3.2 SJ1.2
RESET: C5.1 IC1.1 R_RESET.1 REST_BUTTON.3 REST_BUTTON.4 U2.3
RTC_RST: U2.16 U3.4
RX: TP2.TP U2.24
SCK: D10.2 J1.13 J4.P5 R6.1 TP8.TP U1.6 U2.6
SCL: J3.4 R2-PINH.1 SENSOR2.4 U2.20 U3.16 U4.7
SDA: J3.3 R1-PINH.1 SENSOR2.3 U2.19 U3.15 U4.8
SRC: C4.2 D5.2 L1.1 Q3.3
SS_SD: D8.2 J4.P2 R10.1 U2.4
TX: TP1.TP U2.25
USB_D+: D1.1 U2.14
USB_D-: D1.3 U2.13
VBAT [POWER]: C2_BAT.1 MCP73831.3 Q1.3 TP3.TP U4.2 U4.3
VBUS [POWER]: C1_BAT.1 C4_USB.1 C5_USB.1 CHG_LED.A D1.5 D2.2 MCP73831.4 PFMF.050.1.2 Q1.1 R1_PWRUSB.2 TP14.TP
VRTC [POWER]: C8.1 C10_SUPERCAP.1 R_CAPACITOR.2 U3.14
VUSB [POWER]: J2.A4 J2.A9 J2.B4 J2.B9 PFMF.050.1.1

## Tracks (layer width: path | path; a pad name or v marks a point on that pad's centre or on a via)
3V3
  Top 0.3: R_BOOT.2 52.86,108.47 54.9,106.43 | 54.9,106.43 68.13,106.43 68.43,106.73 68.43,107.86 67.8,108.49 R_CHANGE.2 | 54.9,106.43 54.42,105.95 45.94,105.95 | 45.94,105.95 30.37,105.95 | 30.37,105.95 R_RESET.2 | IC1.2 45.69,101.74 44.74,102.69 44.74,104.75 45.94,105.95 | 30.37,105.95 16.55,105.95 C9.1 8.89,90.8 7.28,89.19 7.07,89.4 J4.P4 5.57,89.41 5.22,89.41 5.1,89.47 4.32,88.69 4.32,85.43 6.91,82.84 6.91,65.26 9.19,62.98 U2.2 9.73,47.8 9.73,47.48 14.18,43.03 R1.1 22.45,43.03 U1.3 32.62,52.91 34.41,51.12 38.05,51.12 38.21,51.28 38.21,52.27 U1.7 | U1.7 U1.8 | D7.2 94.11,59.87 R1_PINH1.2 87.97,46.4 84.16,46.4 83.43,45.67 83.22,45.67 83.22,45.13 U3.2 | U3.2 83.95,44.4 83.95,44 86.21,41.74 R2-PINH1.2 90.74,41.77 91.5,42.53 116.8,42.53 | U3.2 82.56,44.4 82.56,44 80.38,41.82 R_CL1.2 80.38,28.39 | 80.38,28.39 Q2.3 | R8.2 R7.2 117.25,5.31 | 117.25,5.31 R6.2 R5.2 124.33,5.23 R9.2 124.43,5.33 R10.2 162.22,5.33 165.24,8.35 165.24,16.57 164.61,17.2 164.61,18.03 165,18.42 165,18.57 165.04,18.61 J3.2 165.15,19.03 164.79,19.03 164.62,19.2 164.62,21.02 165.57,21.97 165.57,28.16 TP16.TP | C1_BAT2.1 121.27,40.97 C3.+ 116.45,45.79 IC4.5 116.8,45.06 116.8,42.53 | 117.25,5.31 117.25,6.87 116.65,7.47 116.65,10.17 116.8,10.31 116.8,42.53 | 80.38,28.39 80.29,28.33 79.73,28.33 79.45,28.06 66.37,28.06 40.26,54.16 U1.7
32KHZ  (via drill 0.3)
  Top 0.15: v82.99,43.71 85.62,41.08 91.09,41.08 91.71,41.7 91.92,41.7 R2-PINH1.1 | v81.32,44.47 81.95,45.09 U3.1 | v22.32,52.85 18.1,48.62 18.1,48.35 U2.9
  Bottom 0.15: v82.99,43.71 82.09,43.71 v81.32,44.47 81.25,44.47 72.88,52.85 v22.32,52.85
DN  (via drill 0.3)
  Top 0.15: v164.01,53.54 163.04,53.54 J2.B7 | v164.01,54.51 163.04,54.51 J2.A7 | v146.42,45.3 144.62,45.3 D1.4
  Bottom 0.15: v164.01,54.51 v164.01,53.54 163.94,53.54 155.7,45.3 v146.42,45.3
DP  (via drill 0.3)
  Top 0.15: 164.01,55 164.15,55 164.49,54.65 164.49,54.37 164.15,54.03 J2.A6 | 164.01,55 163.04,55 J2.B6 | v146.7,47.17 D1.6 | 164.01,55 v164.01,55.13
  Bottom 0.15: v146.7,47.17 156.05,47.17 v164.01,55.13
EPD_3V3
  Top 0.3: EPD_C5.1 89.86,19.02 89.86,18.31 82.83,18.31 81.97,17.45 81.97,17.01 J1.15 J1.16 81.4,13.71 81.04,13.35 73.09,13.35 TP17.TP 69,17 Q2.2 81.75,26.86 87.05,32.16 | 87.05,32.16 88.95,34.06 88.95,34.43 89.9,35.38 98.98,35.38 99.49,34.87 C7.1 | 87.05,32.16 86.45,32.77 L1.2
EPD_3V3_C
  Top 0.3: Q2.1 78.86,29.9 R_CL1.1 79.08,96.34 EPD_3V3_C.TP 49.61,66.87 21.33,66.87 20.97,66.51 20.62,66.51 20.59,66.42 20.59,65.87 U2.18
EPD_BUSY  (via drill 0.3)
  Top 0.15: v84.92,17.74 84.92,16.98 J1.9 | v49.82,47.17 49.4,47.17 33.13,63.44 20.22,63.44 20.22,63.4 18.61,63.4 18.61,63.44 12.63,63.44 10.48,65.59 10.48,65.8 U2.26 10.48,65.87 10.97,66.35 10.97,69.12 TP9.TP
  Bottom 0.15: v84.92,17.74 84.44,17.25 79.73,17.25 v49.82,47.17
EPD_CS  (via drill 0.3)
  Top 0.15: R9.1 124.4,3.96 121.07,3.96 R5.1 121,3.96 119.2,3.96 v118.44,4.72 | v83.4,15.8 83.4,16.91 J1.12 | v120.1,10.61 121,9.71 D9.2 121.07,9.71 121.21,9.85 124.33,9.85 D6.2 124.4,9.91 127.58,13.1 127.58,16.49 TP10.TP | v21.56,47.17 20.66,48.07 20.66,48.28 U2.11
  Bottom 0.15: v120.1,10.61 118.44,10.61 | 118.44,10.61 88.6,10.61 v83.4,15.8 83.33,15.8 83.19,15.66 80.7,15.66 49.19,47.17 v21.56,47.17 | 118.44,10.61 v118.44,4.72
EPD_DC  (via drill 0.3)
  Top 0.15: v83.4,15.18 83.89,15.66 83.89,16.91 J1.11 | v14.43,46.69 13.04,48.07 13.04,48.28 U2.5 | v11.04,43.71 5.91,43.71 TP11.TP
  Bottom 0.15: v83.4,15.18 64.7,15.18 33.2,46.69 v14.43,46.69 14.01,46.69 v11.04,43.71
EPD_RST  (via drill 0.3)
  Top 0.15: v84.3,17.74 84.37,17.67 84.37,16.98 J1.10 | v76.41,28.82 76.41,31.87 43.58,64.69 TP12.TP 43.51,64.69 42.54,63.72 19.95,63.72 19.95,63.68 18.88,63.68 18.88,63.72 18.45,63.72 16.85,65.31 16.85,65.8 U2.21
  Bottom 0.15: v84.3,17.74 84.3,20.92 v76.41,28.82
FLASH_CS
  Top 0.15: U1.1 32.3,55.48 27.86,55.48 21.91,49.52 21.91,48.35 U2.12
GDR
  Top 0.15: J1.2 88.39,16.91 88.39,16.56 87,15.18 85.06,15.18 80.77,10.88 72.81,10.88 69.69,7.77 68.37,7.77 65.4,10.75 65.4,12.75 R4.1 65.33,12.82 64.91,12.82 61.52,16.22 61.31,16.22 Q3.1
GND  (via drill 0.3, 0.35)
  Top 0.15: 29.56,49.63 22.39,42.46 13.53,42.46 7.99,48 7.99,48.28 U2.1 | 29.56,49.63 31.53,51.6 32.3,51.6 U1.4 32.37,51.6 v33.2,51.6 | 17.06,89.21 17.06,86.16 16.3,85.4 16.3,84.36 J4.G1 16.23,84.29 16.23,76.67 7.99,68.43 7.99,65.87 U2.28 7.99,65.8 7.99,64.69 12.42,60.26 12.42,56.93 U2.29_3 12.42,56.87 13.6,56.87 U2.29_6 13.67,56.87 14.84,56.87 U2.29_9 14.91,56.8 14.91,55.62 U2.29_8 | 17.06,89.21 16.3,89.97 J4.G2 | U2.29_8 14.91,55.55 14.91,54.37 U2.29_7 14.84,54.37 13.67,54.37 U2.29_4 13.6,54.37 12.49,54.37 U2.29_1 12.42,54.37 12.42,55.55 U2.29_2 12.49,55.55 13.6,55.55 U2.29_5 | U2.29_8 14.98,55.9 32.85,55.9 35.13,53.61 36.17,53.61 U1.9 35.13,53.54 v33.96,52.37 | 49.85,102.81 49.47,103.19 48.36,103.19 46.84,101.67 46.84,101.39 46.28,100.84 46.14,100.84 IC1.3 46.08,100.77 45.04,100.77 43.1,98.83 GND.TP 43.03,98.76 30.08,98.76 20.52,89.21 17.06,89.21 | 49.85,102.81 50.37,102.29 C_DELAY.2 | CHANGE_BUTTON.2 66.23,107.28 62.84,107.28 CHANGE_BUTTON.1 62.77,107.21 61.59,108.39 61.24,108.39 C10.2 61.17,108.39 v55.42,108.39 | v53.62,106.59 51.89,106.59 51.27,107.21 BOOT_BUTTON.2 51.2,107.28 47.74,107.28 BOOT_BUTTON.1 47.67,107.28 46.49,108.46 46.08,108.46 C6.2 46.01,108.46 28.97,108.46 28.35,109.08 27.31,109.08 27.17,108.94 27.17,108.11 26.27,107.21 REST_BUTTON.2 26.2,107.28 22.74,107.28 REST_BUTTON.1 22.67,107.28 21.49,108.46 21.28,108.46 C5.2 21.22,108.39 17.75,108.39 8.96,99.59 C9.2 8.89,99.52 8.06,99.52 3,94.47 J4.G4 3,94.4 3,94.12 5.5,91.63 5.63,91.63 J4.P6 5.5,91.56 2.03,88.1 2.03,81.31 J4.G3 | v52.45,105.41 49.85,102.81
  Top 0.15: 77.65,14.49 78.83,14.49 80.84,16.49 80.84,16.91 J1.17 | 77.65,14.49 76.41,14.49 J1.MP2 | R2.1 62.21,7.91 60.62,7.91 60.13,7.42 58.75,7.42 57.99,8.18 57.99,8.39 SJ1.1 57.92,8.46 57.92,10.75 57.23,11.44 57.23,13.79 61.35,17.91 | 77.65,11.16 72.67,11.16 69.55,8.04 68.51,8.04 66.64,9.91 66.64,12.75 R4.2 66.57,12.82 66.57,13.31 62.63,17.25 61.93,17.25 61.45,17.74 61.45,17.81 61.35,17.91 | 77.65,11.16 80.63,11.16 85.34,15.87 85.34,16.91 J1.8 | 61.35,17.91 57.5,21.76 EPD_C2.2 57.43,21.76 29.56,49.63 | v77.65,13.86 77.65,14.49 | 77.65,11.16 v77.65,11.37 | EPD_C12.2 75.51,20.65 77.52,20.65 EPD_C11.2 77.58,20.72 78.48,20.72 79.04,21.27 81.05,21.27 81.53,20.79 EPD_C9.2 81.6,20.72 83.68,20.72 EPD_C8.2 83.75,20.65 85.41,20.65 EPD_C7.2 85.48,20.58 87.56,20.58 EPD_C6.2 87.63,20.58 89.56,20.58 EPD_C5.2 89.63,20.65 89.63,26.67 | 89.63,26.67 89.63,29.37 94.34,34.08 98.43,34.08 TP5.TP | 105.01,36.23 106.12,36.23 111.17,41.28 C1_BAT1.2 111.24,41.35 111.86,41.98 v111.93,41.98 | 105.01,36.23 104.04,36.23 C7.2 103.97,36.23 100.99,39.21 85.13,39.21 84.58,38.65 82.36,38.65 D3.1 | D11.1 113.46,7.98 109.92,7.98 D12.1 109.79,7.98 99.3,18.47 | 99.3,18.47 104.73,23.9 104.73,25.01 104.11,25.63 EPD_C1.2 | 99.3,18.47 95.31,14.49 89.91,14.49 J1.MP1 89.84,14.42 86.8,14.42 84.51,12.13 v83.54,12.13 | 105.01,36.23 105.01,26.6 104.11,25.7 EPD_C1.2 | 89.63,26.67 103.07,26.67 104.04,25.7 EPD_C1.2 | C1_BAT2.2 125.92,42.32 122.94,42.32 120.66,44.61 C3.- 120.66,44.68 121.21,45.23 121.21,46.34 | 121.21,46.34 121.21,47.66 120.59,48.28 120.59,48.49 R2_BAT.2 120.52,48.62 v120.52,53.33
  Top 0.15: 110.83,44.82 113.25,44.82 IC4.2 113.32,44.89 113.46,44.89 114.91,46.34 121.21,46.34 | 110.83,44.82 110.27,44.82 109.3,43.85 108.54,43.85 R1_PWRUSB.1 108.47,43.85 100.23,43.85 99.88,44.19 99.81,44.19 | 110.83,44.82 110.83,46.06 109.58,47.31 109.58,52.78 C1_BAT.2 | 99.81,44.19 99.68,44.05 94.83,44.05 94.34,44.54 94.34,45.37 95.04,46.06 95.04,46.2 C8.2 95.04,46.27 94.83,46.48 94.83,60.33 94.55,60.6 91.44,60.6 91.3,60.47 91.3,59.43 92.13,58.6 92.13,57.21 91.99,57.07 91.92,57.07 90.33,55.48 90.33,53.54 89.91,53.13 86.73,53.13 85.83,54.03 85.83,54.37 U3.13 | 99.81,44.19 99.81,46.27 98.91,47.17 C10_SUPERCAP.2 | J2.B12 163.04,51.19 163.04,50.98 J2.A1 163.11,50.91 163.11,49.66 163.59,49.18 J2.MP3 163.66,49.25 167.47,49.25 J2.MP1 | 169.41,32.77 169.41,47.38 167.61,49.18 J2.MP1 | 169.41,32.77 169.41,29.86 168.03,28.47 168.03,19.75 165.95,17.67 165.6,17.67 J3.1 | J2.MP2 167.54,59.36 167.54,49.25 J2.MP1 | C2.2 149.05,9.43 150.3,9.43 C1.2 | SENSOR2.7 148.98,15.87 148.77,15.87 148.29,15.38 148.29,14.76 148.77,14.28 148.98,14.28 SENSOR2.5 148.98,14.21 148.98,9.5 C2.2 | SENSOR2.1 151.89,16.63 150.85,16.63 150.16,15.94 149.05,15.94 SENSOR2.7 | D10.1 117.4,8.04 118.3,8.04 118.79,7.56 120.45,7.56 121,8.11 D9.1 121.07,8.18 121.21,8.32 124.33,8.32 D6.1 124.4,8.39 127.72,8.39 D8.1 127.79,8.39 128.34,8.39 129.45,9.5 148.91,9.5 C2.2 | U4.4 100.09,56.31 100.37,56.31 101.06,57 U4.9 | U4.1 100.09,57.77 100.37,57.77 101.06,57.07 U4.9 | U4.6 101.96,56.87 101.27,56.87 101.13,57 U4.9 | U4.9 100.78,57.42 102.52,59.15 116.23,59.15 117.96,57.42 118.37,57.42 MCP73831.2 118.51,57.42 v119.76,57.42
  Top 0.15: J2.MP4 163.52,59.36 163.04,58.87 163.04,57.7 J2.A12 163.04,57.63 163.04,57.35 J2.B1 162.97,57.28 157.92,57.28 148.91,48.28 148.84,48.28 | 144.62,38.65 143.72,38.65 143.09,39.28 142.96,39.28 C5_USB.2 | 144.62,38.65 144.76,38.79 144.76,41.84 144.2,42.39 C4_USB.2 144.2,42.46 148.84,47.1 148.84,48.28 | 148.84,48.28 148.5,48.62 147.6,48.62 R2-USB.2 147.53,48.62 144.76,48.62 142.4,46.27 142.13,46.27 D1.2 142.06,46.2 141.02,46.2 140.05,45.23 138.73,45.23 R2-USB1.1 138.66,45.23 125.51,58.39 121.97,58.39 C2_BAT.2 121.83,58.46 121.56,58.74 v121.07,58.74 | 144.62,38.65 144.62,30.97 | 144.62,30.97 144.62,19.95 148.71,15.87 SENSOR2.7 | 169.41,32.77 147.8,32.77 147.04,32.01 147.04,31.17 146.84,30.97 144.62,30.97
  Bottom 0.15: v33.96,52.37 v33.2,51.6 | v55.42,108.39 v53.62,106.59 v52.45,105.41 | v77.65,11.37 77.65,12.13 | 77.65,12.13 v77.65,13.86 | v83.54,12.13 77.65,12.13 | v121.07,58.74 v119.76,57.42 119.76,57.35 120.52,56.59 v120.52,53.33 120.52,52.09 111.93,43.5 v111.93,41.98
  other vias: 7.42,103.39 87.68,100.69 87.68,25.41 4.18,27.85 4.18,37.33 11.2,37.33 71.46,78.49 54.98,63.05 65.52,36.53 65.52,61.97 5.14,68.21 15.16,64.09 21.72,64.39 18.9,64.71 29.66,51.39 47.84,35.41 46.5,57.33 57.92,45.21 100.6,14.27 128.36,56.19 34.68,58.71 97.4,57.89 11.12,62.15 8,61.41 12.36,61.31 9.82,62.51 8.52,67.77
  pour Top: 0.6,111.35 19.68,111.35 19.68,109.55 70.18,109.55 70.18,111.63 92.6,111.63 92.6,67.57 170.54,67.57 170.54,-0.01 91.8,-0.01 91.8,10.23 73.68,10.23 73.68,0.15 0,0.15 0,47.35 6.48,47.35 6.48,66.87 0.6,66.87
  pour Bottom: 0.6,111.35 19.68,111.35 19.68,109.53 70.2,109.53 70.2,111.63 92.6,111.63 92.6,67.57 170.56,67.57 170.56,-0.01 91.8,-0.01 91.8,10.23 73.68,10.23 73.68,0.15 0,0.15 0,47.35 6.48,47.35 6.48,66.89 0.6,66.89
GPIO8
  Top 0.15: R1.2 19.83,44.33 19.83,47.86 19.41,48.28 U2.10
I2C_PW  (via drill 0.3)
  Top 0.15: C2.1 149.05,8.18 150.3,8.18 C1.1 150.37,8.18 151.61,9.43 R2-PINH.2 | R1-PINH.2 152.86,9.29 151.75,9.29 151.68,9.36 R2-PINH.2 | 150.92,15.11 149.05,15.11 SENSOR2.6 | 150.92,15.11 151.68,15.87 151.89,15.87 SENSOR2.2 151.96,15.94 152.24,15.94 152.65,16.35 152.65,16.98 152.44,17.18 150.99,17.18 150.51,16.7 149.05,16.7 SENSOR2.8 148.98,16.7 v148.36,17.32 | v78.55,45.99 58.61,65.94 43.03,65.94 41.64,64.55 22.95,64.55 21.91,65.59 21.91,65.8 U2.17 | 150.92,15.11 150.92,14.21 151.61,13.52 151.61,9.5 R2-PINH.2
  Bottom 0.15: v78.55,45.99 78.76,45.99 82.57,42.18 108.4,42.18 133.26,17.32 v148.36,17.32
INT_RTC  (via drill 0.3)
  Top 0.15: 85.03,43.74 84.58,44.19 84.58,45.09 U3.3 | 85.03,43.74 85.55,43.22 88.04,43.22 88.87,44.05 88.87,45.99 94.07,51.19 R1_PINH1.1 | v18.72,47.24 17.68,47.24 16.85,48.07 16.85,48.28 U2.8 | 85.03,43.74 v85,43.71 | v102.79,56.45 104.25,57.91 TP15.TP
  Bottom 0.15: v18.72,47.24 21.01,47.24 21.42,47.66 77.52,47.66 81.95,43.22 84.51,43.22 v85,43.71 85.06,43.71 85.55,43.22 85.83,43.22 99.05,56.45 v102.79,56.45
IO/BOOT  (via drill 0.3)
  Top 0.15: R_BOOT.1 52.72,107.21 52.17,107.77 52.17,107.83 51.27,108.73 BOOT_BUTTON.3 51.2,108.73 47.74,108.73 BOOT_BUTTON.4 47.67,108.8 47.39,109.08 45.52,109.08 45.38,108.94 v45.24,108.94 | v45.24,107.97 46.01,107.21 C6.1 | v25.3,66.35 24.82,65.87 24.47,65.87 U2.15
  Bottom 0.15: v45.24,108.94 v45.24,107.97 45.24,107.9 45.73,107.42 45.73,103.4 25.3,82.97 v25.3,66.35
IO/CHANGE
  Top 0.15: C10.1 61.17,107.14 56.05,107.14 54.94,108.25 54.94,108.53 55.42,109.01 62.49,109.01 62.77,108.73 CHANGE_BUTTON.4 62.84,108.73 66.23,108.73 CHANGE_BUTTON.3 | R_CHANGE.1 67.68,107.21 67.68,107.42 66.44,108.67 66.3,108.67 CHANGE_BUTTON.3 | U2.23 14.29,65.87 14.29,66.08 48.5,100.29 62.49,100.29 68.79,106.59 68.79,108.53 68.24,109.08 67.2,109.08 66.64,108.53 CHANGE_BUTTON.3
MISO  (via drill 0.3)
  Top 0.15: v4.73,93.5 5.5,92.74 5.84,92.74 J4.P7 | v4.73,96.82 4.73,97.52 4.18,98.07 TP6.TP | v110.62,4.72 109.92,4.03 R8.1 | v110.62,8.74 109.92,9.43 D12.2 109.86,9.5 v109.86,18.43 | v27.59,54.16 32.3,54.16 U1.2 | v10.07,64.69 9.23,65.52 9.23,65.8 U2.27 | v43.86,53.75 v55.7,41.91
  Bottom 0.15: v4.73,96.82 v4.73,93.5 4.73,70.72 8.82,66.63 8.82,62.61 11.59,59.84 11.94,59.84 13.43,61.33 | v110.62,8.74 v110.62,4.72 | 13.43,61.33 v10.07,64.69 | 13.43,61.33 20.59,54.16 v27.59,54.16 27.66,54.16 28.07,53.75 v43.86,53.75 | v109.86,18.43 86.38,41.91 v55.7,41.91
MOSI  (via drill 0.3)
  Top 0.15: 109.23,5.76 109.23,3.54 109.37,3.4 110.41,3.4 110.96,3.96 113.32,3.96 R7.1 | 109.23,5.76 110.75,7.28 114.08,7.28 114.22,7.42 114.22,8.74 113.52,9.43 D11.2 | v82.99,17.74 82.85,17.74 82.43,17.32 82.43,16.98 J1.14 82.43,16.91 82.43,15.52 v83.4,14.55 | v82.57,22.03 82.57,25.5 90.19,33.11 90.19,33.88 TP7.TP | 109.23,5.76 97.25,5.76 90.53,12.48 v85.48,12.48 | v30.49,49.94 37.42,49.94 39.08,51.6 40.12,51.6 U1.5 40.19,51.6 64.29,27.5 v77.03,27.5 | 16.12,49.14 15.61,48.62 15.61,48.35 U2.7 | 16.12,49.14 v16.92,49.94 | v7.43,66.98 7.43,82.83 4.87,85.4 4.87,87.27 5.84,88.24 J4.P3 | v14.08,49.94 15.33,49.94 16.12,49.14
  Bottom 0.15: v82.99,17.74 82.99,21.62 v82.57,22.03 82.5,22.03 v77.03,27.5 | v83.4,14.55 v85.48,12.48 | v16.92,49.94 v30.49,49.94 | v7.43,66.98 7.43,56.59 v14.08,49.94
N$1
  Top 0.15: EPD_C10.2 79.59,20.65 80.36,20.65 81.53,19.47 EPD_C9.1
N$2  (via drill 0.3)
  Top 0.15: v148.36,48.14 147.6,47.38 R2-USB.1 | v164.01,55.76 163.87,55.76 163.66,55.97 163.04,55.97 J2.B5
  Bottom 0.15: v148.36,48.14 156.39,48.14 v164.01,55.76
N$3
  Top 0.15: J1.24 77.38,16.98 77.38,17.39 75.51,19.26 EPD_C12.1
N$4  (via drill 0.3)
  Top 0.15: v109.23,41.98 109.86,41.35 C1_BAT1.1 | v109.23,43.09 109.72,43.09 110.06,43.43 D2.1 110.13,43.5 110.48,43.85 113.25,43.85 IC4.3 | v112,45.79 113.25,45.79 IC4.1 | v128.48,47.38 129.52,47.38 Q1.2
  Bottom 0.15: v112,45.79 109.3,43.09 v109.23,43.09 v109.23,41.98 109.3,41.98 109.79,41.49 112.07,41.49 117.96,47.38 v128.48,47.38
N$5
  Top 0.15: D4.1 92.82,31.17 95.52,28.47 99.54,28.47 C4.1 99.54,28.54 104.73,33.74 104.73,35.26 104.52,35.47 103.62,35.47 100.51,38.58 85.89,38.58 D3.2
N$6  (via drill 0.3)
  Top 0.15: v117.82,50.01 120.52,47.31 R2_BAT.1 | v116.23,55.76 116.23,56.03 115.88,56.38 MCP73831.5
  Bottom 0.15: v117.82,50.01 117.82,55.55 117.47,55.9 116.36,55.9 v116.23,55.76
N$7
  Top 0.15: CHG_LED.C 114.91,52.85 114.91,51.6 R1_BAT.2
N$8  (via drill 0.3)
  Top 0.15: v114.22,52.3 114.22,52.23 113.59,51.6 R1_BAT.1 | v117.33,55.41 118.37,56.45 MCP73831.1
  Bottom 0.15: v117.33,55.41 v114.22,52.3
N$9
  Top 0.15: R2-USB1.2 138.73,46.48 138.73,47.17 152.31,60.74 164.63,60.74 164.84,60.54 164.84,53.75 164.15,53.06 163.11,53.06 J2.A5
N$10
  Top 0.15: J1.20 79.45,16.98 79.45,17.39 80.91,18.85 82.43,18.85 82.92,19.33 83.68,19.33 EPD_C8.1
N$11
  Top 0.15: J1.19 79.94,16.98 79.94,17.32 81.19,18.57 82.57,18.57 82.78,18.78 84.86,18.78 85.41,19.33 EPD_C7.1
N$12  (via drill 0.3)
  Top 0.15: v84.72,21.55 75.3,21.55 74.81,21.06 74.81,18.64 77.17,16.29 80.15,16.29 80.36,16.49 80.36,16.91 J1.18 | v86.73,19.47 87.35,19.47 87.56,19.26 EPD_C6.1
  Bottom 0.15: v84.72,21.55 86.73,19.54 v86.73,19.47
N$13  (via drill 0.3)
  Top 0.15: v86.17,15.66 86.86,16.35 86.86,16.91 J1.5 | v85.2,14.69 85,14.69 80.91,10.61 72.94,10.61 69.48,7.14 57.5,7.14 56.95,7.7 56.95,19.95 57.43,20.44 EPD_C2.1
  Bottom 0.15: v85.2,14.69 v86.17,15.66
N$14
  Top 0.15: J1.4 87.42,16.98 87.42,17.32 88.04,17.95 97.67,17.95 104.04,24.32 EPD_C1.1
N$15  (via drill 0.35)
  other vias: 25.16,31.65 23.36,31.65 21.56,31.65 19.76,31.65 17.96,31.65 16.16,31.65 14.36,31.65 12.56,31.65 10.76,31.65 8.96,31.65 7.16,31.65 25.16,29.85 23.36,29.85 19.76,20.85 17.96,20.85 16.16,20.85 14.36,20.85 12.56,20.85 10.76,20.85 8.96,20.85 7.16,20.85 21.56,20.85 23.36,20.85 25.16,20.85 7.16,22.65 8.96,22.65 10.76,22.65 12.56,22.65 14.36,22.65 16.16,22.65 17.96,22.65 19.76,22.65 21.56,22.65 23.36,22.65 25.16,22.65 7.16,24.45 8.96,24.45 10.76,24.45 12.56,24.45 14.36,24.45 16.16,24.45 17.96,24.45 19.76,24.45 21.56,24.45 23.36,24.45 25.16,24.45 7.16,26.25 8.96,26.25 10.76,26.25 12.56,26.25 14.36,26.25 16.16,26.25 17.96,26.25 19.76,26.25 21.56,26.25 23.36,26.25 25.16,26.25 7.16,28.05 8.96,28.05 10.76,28.05 12.56,28.05 14.36,28.05 16.16,28.05 17.96,28.05 19.76,28.05 21.56,28.05 23.36,28.05 25.16,28.05 7.16,29.85 8.96,29.85 10.76,29.85 12.56,29.85 14.36,29.85 16.16,29.85 17.96,29.85 19.76,29.85 21.56,29.85
N$18
  Top 0.15: IC1.5 48.98,102.64 50.58,101.05 C_DELAY.1
N$19
  Top 0.15: R_CAPACITOR.1 90.26,57.7 86.24,57.7 84.02,55.48 84.02,53.33 84.51,52.85 90.95,52.85 92.4,54.3 92.4,59.5 91.99,59.91 D7.1
PREVGH  (via drill 0.3)
  Top 0.15: J1.21 78.9,16.98 78.9,18.71 79.52,19.33 EPD_C10.1 79.59,19.4 80.15,19.95 v80.29,19.95 | v82.43,19.95 90.05,19.95 92.61,22.52 92.61,25.84 D5.1
  Bottom 0.15: v80.29,19.95 v82.43,19.95
PREVGL  (via drill 0.3)
  Top 0.15: J1.23 77.86,16.98 77.86,19.05 77.58,19.33 EPD_C11.1 77.58,19.4 v78.21,20.02 | v93.72,31.17 96.28,31.17 D4.2
  Bottom 0.15: v93.72,31.17 78.14,31.17 75.92,28.96 75.92,22.31 v78.21,20.02
RESE  (via drill 0.3)
  Top 0.15: v81.81,10.88 81.81,11.02 83.4,12.62 83.75,12.62 85.83,14.69 87.56,14.69 89.29,16.42 89.29,17.39 89.08,17.6 88.18,17.6 87.9,17.32 87.9,16.98 J1.3 | v63.18,15.66 62.63,16.22 Q3.2 62.56,16.29 61.86,16.98 60.9,16.98 57.85,13.93 57.85,11.99 R3.1
  Bottom 0.15: v81.81,10.88 67.96,10.88 v63.18,15.66
RESE'
  Top 0.15: R3.2 59.09,11.92 59.09,8.81 59.44,8.46 SJ1.2 59.16,9.22 62.21,9.22 R2.2
RESET  (via drill 0.3)
  Top 0.15: 25.16,108.73 26.2,108.73 REST_BUTTON.3 | 25.16,108.73 REST_BUTTON.4 | C5.1 21.28,107.14 21.98,106.45 27.1,106.45 27.79,107.14 R_RESET.1 27.86,107.14 v28.49,106.52 | v45.24,103.54 46.08,102.71 IC1.1 | v10.41,61.64 10.41,48.35 U2.3 | v25.16,108.67 25.16,108.73
  Bottom 0.15: 31.46,103.54 v45.24,103.54 | 31.46,103.54 v28.49,106.52 28.42,106.52 26.27,108.67 v25.16,108.67 | v10.41,61.64 10.41,63.31 9.1,64.62 9.1,81.1 31.46,103.47 31.46,103.54
RTC_RST  (via drill 0.3)
  Top 0.15: v78.55,50.84 63.18,66.21 42.89,66.21 41.5,64.83 23.92,64.83 23.22,65.52 23.22,65.8 U2.16 | v85.69,43.71 85.69,45.02 85.76,45.09 U3.4
  Bottom 0.15: v85.69,43.71 v78.55,50.84
RX
  Top 0.15: U2.24 13.04,65.87 13.04,73.07 21.15,81.17 21.15,88.1 TP2.TP
SCK  (via drill 0.3)
  Top 0.15: v39.36,52.09 40.12,52.85 U1.6 | v15.12,49.46 14.29,48.62 14.29,48.35 U2.6 | v4.25,89.41 5.29,90.45 5.84,90.45 J4.P5 | v118.3,3.96 117.33,3.96 R6.1 | v118.93,8.04 D10.2 | v82.92,16.15 82.92,16.91 J1.13 | v78.35,30.69 78.35,42.53 76.06,44.82 TP8.TP 75.99,44.89 v68.79,52.09
  Bottom 0.15: v4.25,89.41 4.25,70.79 8.54,66.49 8.54,56.1 15.12,49.52 v15.12,49.46 31.67,49.46 34.3,52.09 v39.36,52.09 v68.79,52.09 | v118.3,3.96 118.93,4.58 v118.93,8.04 118.93,8.81 120.59,10.47 120.59,10.75 113.73,17.6 85.41,17.6 | v82.92,16.15 83.12,16.15 83.96,16.98 84.79,16.98 85.41,17.6 | 85.41,17.6 85.41,20.23 78.35,27.3 v78.35,30.69
SCL  (via drill 0.3)
  Top 0.15: 152.41,13.76 151.96,14.21 SENSOR2.4 | 152.41,13.76 153.62,12.55 153.62,8.88 153.41,8.67 152.51,8.67 151.96,8.11 151.68,8.11 R2-PINH.1 | 157.95,22.27 153.28,17.6 153.28,14.62 152.41,13.76 | 157.95,22.27 167.4,31.73 168.3,31.73 169.13,30.9 169.13,30 167.75,28.61 167.75,23.63 165.6,21.48 165.6,20.65 J3.4 | v102.79,57.28 102.03,57.28 U4.7 | v84.51,57.28 82.02,54.79 82.02,54.44 U3.16 | v18.1,64.69 18.1,65.8 U2.20 | v147.94,32.28 157.95,22.27
  Bottom 0.15: v18.1,64.69 18.1,64.28 28.14,54.23 81.39,54.23 84.44,57.28 v84.51,57.28 v102.79,57.28 102.86,57.28 104.8,59.22 121.21,59.22 147.94,32.49 v147.94,32.28
SDA  (via drill 0.3)
  Top 0.15: v153.76,8.39 153.34,7.98 R1-PINH.1 | v152.79,14.76 152.24,14.76 151.96,15.04 SENSOR2.3 | v166.64,19.61 165.6,19.61 J3.3 | v102.31,58.32 102.03,58.04 102.03,57.84 U4.8 | v86.45,58.32 83.26,55.13 83.26,54.44 U3.15 | v19.41,64.21 19.41,65.8 U2.19
  Bottom 0.15: 153.76,13.79 v153.76,8.39 | v152.79,14.76 153.76,13.79 | 159.65,19.61 v166.64,19.61 | 159.65,19.61 153.83,13.79 153.76,13.79 | v19.41,64.21 19.41,63.38 28.28,54.51 81.12,54.51 84.92,58.32 v86.45,58.32 96.84,58.32 96.84,58.45 97.95,58.45 97.95,58.32 v102.31,58.32 102.38,58.32 103.55,59.5 121.35,59.5 159.65,21.2 159.65,19.61
SRC  (via drill 0.3)
  Top 0.15: v98.71,28.96 98.77,28.96 99.54,29.72 C4.2 | v97.11,26.19 96.42,26.19 96.14,25.91 D5.2 | v80.15,27.5 78.35,27.5 69.21,18.36 61.93,18.36 Q3.3 | v81.81,27.64 81.81,32.77 L1.1
  Bottom 0.15: v98.71,28.96 98.71,27.78 v97.11,26.19 97.04,26.19 95.73,27.5 81.81,27.5 | 81.81,27.5 v80.15,27.5 | v81.81,27.64 81.81,27.5
SS_SD  (via drill 0.3)
  Top 0.15: v128.48,4.72 128.41,4.72 127.79,4.1 R10.1 127.72,4.03 125.58,4.03 124.67,3.13 99.47,3.13 90.95,11.64 v84.65,11.64 | v128.48,9.15 127.79,9.85 D8.2 | v11.73,60.33 U2.4 11.8,48.28 11.8,48 v13.88,45.92 | v9.58,80.97 9.58,83.87 J4.P2
  Bottom 0.15: v128.48,9.15 v128.48,4.72 | v11.73,60.33 11.73,62.41 9.58,64.55 v9.58,80.97 | v84.65,11.64 81.39,14.9 64.57,14.9 33.54,45.92 v13.88,45.92
TX  (via drill 0.3)
  Top 0.15: v8.61,68.43 8.61,68.57 10.41,70.37 11.52,70.37 12.21,69.68 12.21,68.64 11.8,68.22 11.8,65.87 U2.25 | v6.4,69.68 4.67,69.68 3.42,68.43 TP1.TP
  Bottom 0.15: v8.61,68.43 7.64,68.43 v6.4,69.68
USB_D+  (via drill 0.3)
  Top 0.15: v139.36,47.17 142.06,47.17 D1.1 | v33.13,55 33.13,54.03 32.5,53.4 29.52,53.4 24.47,48.35 U2.14
  Bottom 0.15: v139.36,47.17 134.09,47.17 121.49,59.77 37.91,59.77 v33.13,55
USB_D-  (via drill 0.3)
  Top 0.15: v141.16,45.72 141.57,45.3 142.06,45.3 D1.3 | v28.42,55 27.79,55 23.22,50.43 23.22,48.35 U2.13
  Bottom 0.15: v141.16,45.72 141.16,45.99 127.1,60.05 33.47,60.05 v28.42,55
VBAT
  Top 0.3: U4.3 U4.2 98.67,57.3 98.12,57.85 98.12,58.75 99.02,59.65 117.14,59.65 MCP73831.3 120.71,58.35 C2_BAT.1 128.64,50.42 Q1.3 130.01,48.14 130.11,48.14 135.15,43.09 TP3.TP
VBUS
  Top 0.3: TP14.TP 110.13,60.17 97.06,60.17 96.3,59.41 96.3,57.03 100.53,52.8 105.62,52.8 | 105.62,52.8 C1_BAT.1 108.98,53.53 110.02,53.53 110.64,52.9 CHG_LED.A 114.46,53.89 116.78,53.89 | 116.78,53.89 121.21,53.89 Q1.1 133.87,41.23 133.87,39.29 134.62,38.54 135.68,38.54 137.18,40.05 141.57,40.05 | 105.62,52.8 108.5,49.92 R1_PWRUSB.2 108.94,45.58 D2.2 | 141.57,40.05 143.37,40.05 144.09,39.32 C5_USB.1 142.89,40.63 C4_USB.1 143.03,42.46 143.03,45.02 144.2,46.2 144.55,46.2 D1.5 | 116.78,53.89 116.78,56.8 115.88,57.7 115.88,58.32 MCP73831.4 | 141.57,40.05 141.57,33.04 PFMF.050.1.2
VRTC
  Top 0.3: C10_SUPERCAP.1 98.81,44.93 C8.1 95.05,45.04 95.78,45.77 95.78,46.7 95.2,47.27 95.2,62.13 94.6,62.73 91.22,62.73 90.84,62.35 90.84,58.49 R_CAPACITOR.2 89.52,55.71 85.43,55.71 84.77,55.05 84.66,55.05 84.66,54.99 84.58,54.93 84.58,54.44 U3.14
VUSB
  Top 0.3: 162.9,51.88 162.67,51.66 162.36,51.66 162.2,51.49 162.03,51.32 | 162.9,51.88 J2.B9 | 162.03,51.32 146.05,35.34 PFMF.050.1.1 | 162.03,51.32 162.03,56.16 162.33,56.46 162.64,56.46 J2.A9 J2.B4 | J2.A4 163.04,51.74 162.97,51.81 162.9,51.88